# EAGLE board breadboard_shield_v0.95_rev6_161019 (EAGLE 7.7.0)
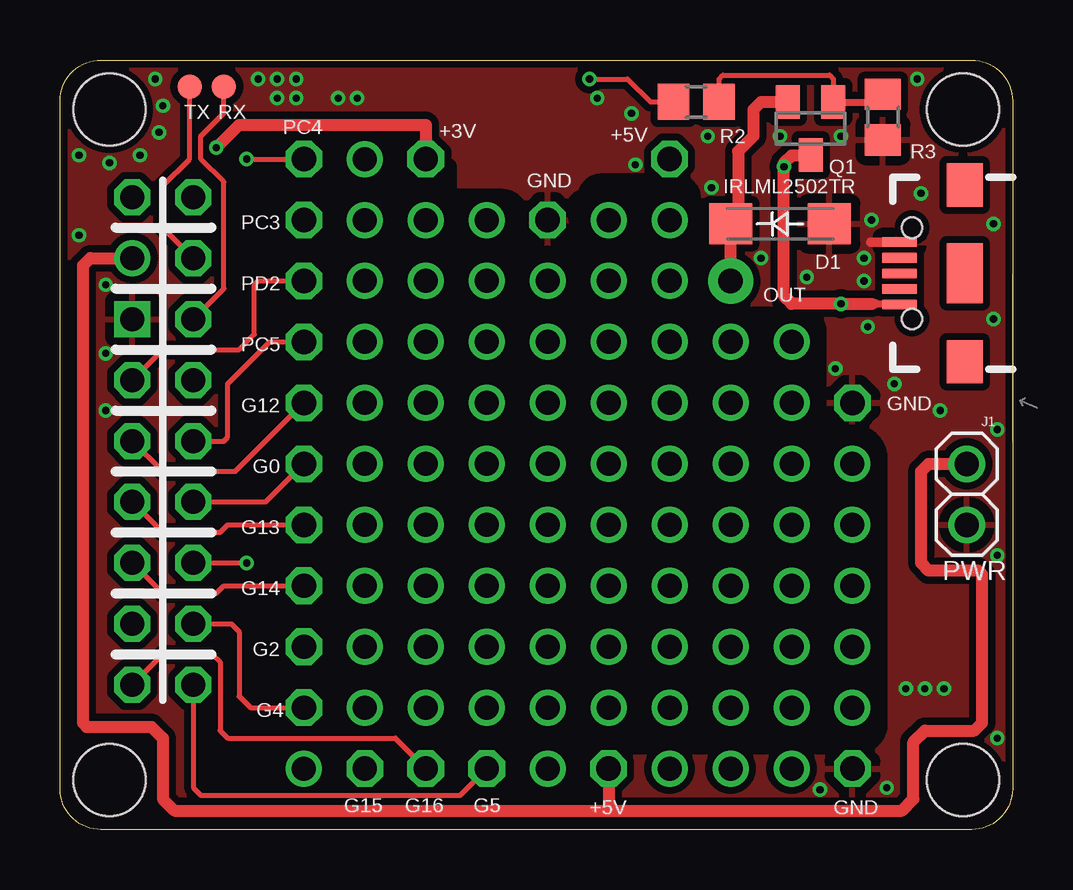
[diagram p0: board, top side]
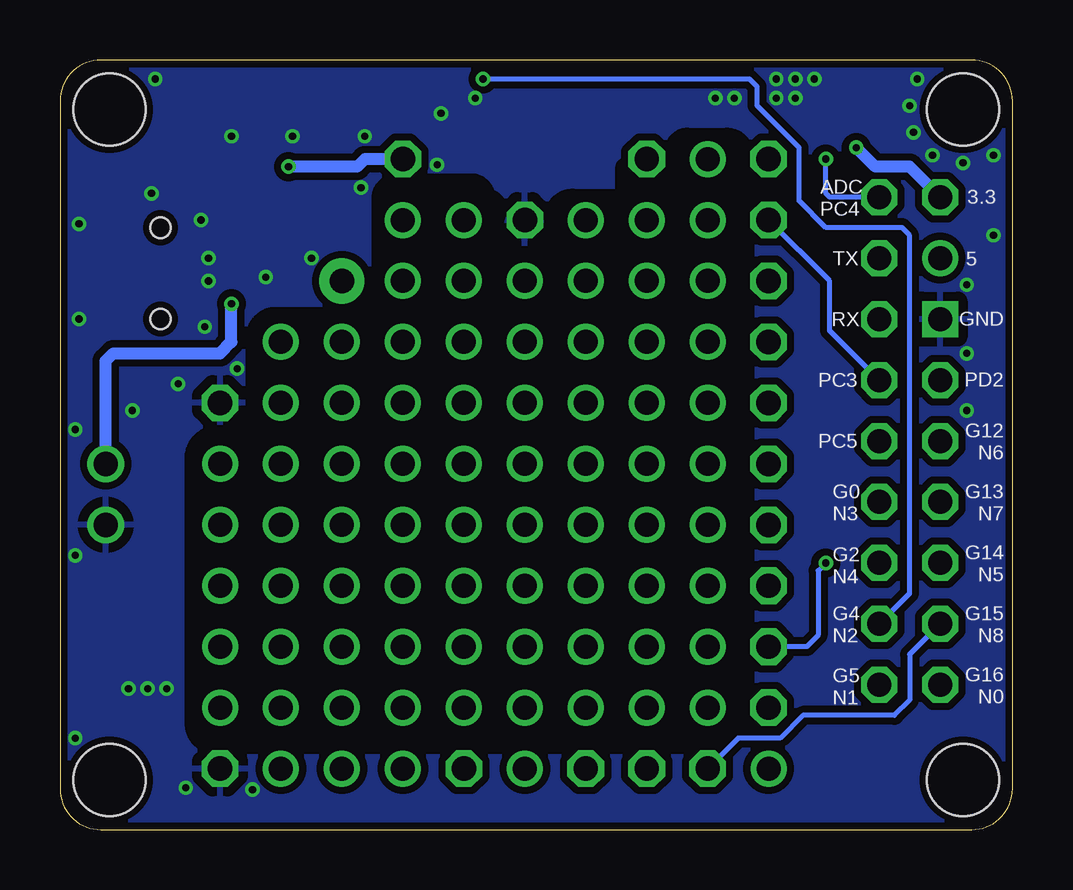
[diagram p1: board, bottom side, seen from below]

Size 39.69 x 32.07 mm. Coordinates in mm from the lower left corner, seen from the top.
Outline: 1.8,32.07 37.55,32.07
Outline: 37.99,0 1.7,0 arc-90 0,1.7 0,30.37 arc-90 1.7,32.07 37.99,32.07 arc-90 39.69,30.37 39.69,1.7 arc-90 37.99,0
Copper layers (1*16): Top 0.035mm / dielectric 1.5mm / Bottom 0.035mm
Design rules "rezonit_35mm": minimum track width 0.2mm, minimum drill 0.3mm, track to track 0.2mm, track to pad 0.2mm, pad to pad 0.2mm, via to via 0.2mm, smd to smd 0.1mm, copper to edge 0.25mm, drill to drill 0.2mm, minimum pad ring 0.2mm, minimum via ring 0.15mm, stop-mask expansion 0.05mm, vias tented up to drill 0.7mm, thermal gap 0.4mm
Holes 3 mm at 2.06,2.06 37.62,2.06 2.06,30 37.62,30
tRestrict: area 11.1,3.5 to 34.1,28.9
bRestrict: area 11.1,3.5 to 34.1,28.9

## Footprints (pad centres in the part's own frame; a part is rotated, then mirrored left to right if it is on the bottom)
1X01 = drill 1.016 octagon: 1 0,0
COMM_V2_L(SHIELD) = drill 1 octagon: 3V3 -1.27,10.16; A/PC4 1.27,10.16; G0N3 1.27,-2.54; G2N4 1.27,-5.08; G4N2 1.27,-7.62; G5N1 1.27,-10.16; G12N6 -1.27,0; G13N7 -1.27,-2.54; G14N5 -1.27,-5.08; G15N8 -1.27,-7.62; G16N0 -1.27,-10.16; PC3 1.27,2.54; PC5 1.27,0; PD2 -1.27,2.54; RX 1.27,5.08; TX 1.27,7.62 | drill 1: 5V -1.27,7.62 | drill 1 square: GND -1.27,5.08
SMA-DO214AC = smd 1.8 x 1.7: A -2.05,0; K 2.05,0
USB-B-MICRO-SMD_V03 = smd 1.45 x 0.4: D+ 2.725,0; D- 2.725,0.65; GND 2.725,-1.3; ID 2.725,-0.65; VBUS 2.725,1.3 | smd 1.5 x 1.8: SHIELD1 0,3.685; SHIELD2 0,-3.685 | smd 1.5 x 2.5: SHIELD3 0,0 | hole 0.85: 2.2,1.9; 2.2,-1.9
1X01' = drill 1.016 pad 1.88: 1 0,0
1X02 = drill 1.016: 1 -1.27,0; 2 1.27,0
SOT23 = smd 1 x 1.4: 1 -0.95,-1.1; 2 0.95,-1.1; 3 0,1.1
R0805 = smd 1.3 x 1.5: 1 -0.95,0; 2 0.95,0
PAD.03X.04 = smd 1.016 x 1.016: P$1 0,0

## Placement (x,y rotation side)
+3V  [1X01]  15.24,27.94 0 top
+5V  [1X01]  25.4,27.94 0 top
+5V1  +5V  [1X01]  22.86,2.54 0 top
COMM  [COMM_V2_L(SHIELD)]  4.29,16.19 0 top
D1  GF1  [SMA-DO214AC]  30,25.24 180 top
G0  [1X01]  10.16,15.24 0 top
G2  [1X01]  10.16,7.62 0 top
G4  [1X01]  10.16,5.08 0 top
G5  [1X01]  17.78,2.54 0 top
G12  [1X01]  10.16,17.78 0 top
G13  [1X01]  10.16,12.7 0 top
G14  [1X01]  10.16,10.16 0 top
G15  [1X01]  12.7,2.54 0 top
G16  [1X01]  15.24,2.54 0 top
GND  [1X01]  20.32,25.4 0 top
GND1  GND  [1X01]  33.02,2.54 0 top
GND2  GND  [1X01]  33.02,17.78 0 top
J1  [USB-B-MICRO-SMD_V03]  37.7,23.18 180 top
OUT  [1X01']  27.94,22.86 0 top
PC3  [1X01]  10.16,25.4 0 top
PC4  [1X01]  10.16,27.94 0 top
PC5  [1X01]  10.16,20.32 0 top
PD2  [1X01]  10.16,22.86 0 top
PWR  [1X02]  37.78,13.97 270 top
Q1  IRLML2502TR  [SOT23]  31.27,29.21 180 top
R2  300R  [R0805]  26.51,30.32 180 top
R3  10k  [R0805]  34.29,29.69 90 top
RX  TEST-POINT3X4  [PAD.03X.04]  6.83,30.96 0 top
TX  TEST-POINT3X4  [PAD.03X.04]  5.4,30.96 0 top

## Library data of the parts
+3V +5V +5V1 G0 G2 G4 G5 G12-G16 GND GND1 GND2 PC3-PC5 PD2 PWR = pinhead
COMM = ESP12
D1 = diode
J1 = SparkFun-Connectors; PROD_ID: CONN-11752
OUT = SparkFun-Connectors
Q1 = transistor-small-signal
R2 R3 = rcl
RX TX = SparkFun-Passives

## Nets
+3V3: +3V.1 COMM.3V3
+5V: +5V1.1 +5V.1 COMM.5V J1.VBUS PWR.1 Q1.3
G0N3: COMM.G0N3 G0.1
G2N4: COMM.G2N4 G2.1
G4N2: COMM.G4N2 G4.1 R2.2
G5N1: COMM.G5N1 G5.1
G12N6: COMM.G12N6 G12.1
G13N7: COMM.G13N7 G13.1
G14N5: COMM.G14N5 G14.1
G15N8: COMM.G15N8 G15.1
G16N0: COMM.G16N0 G16.1
GND: COMM.GND D1.A GND1.1 GND2.1 GND.1 J1.GND PWR.2 R3.1
N$1: Q1.1 R2.1 R3.2
OUT: D1.K OUT.1 Q1.2
PC3: COMM.PC3 PC3.1
PC4: COMM.A/PC4 PC4.1
PC5: COMM.PC5 PC5.1
PD2: COMM.PD2 PD2.1
RX: COMM.RX RX.P$1
TX: COMM.TX TX.P$1

## Tracks (layer width: path | path; a pad name or v marks a point on that pad's centre or on a via)
+3V3  (via drill 0.3 pad 0.6)
  Top 0.5: v6.51,28.42 7.46,29.37 15.24,29.37 +3V.1
  Bottom 0.5: v6.51,28.42 5.71,27.62 4.29,27.62 COMM.3V3
+5V  (via drill 0.3 pad 0.6)
  Top 0.3: 33.97,21.91 34.87,21.91 J1.VBUS | Q1.3
  Top 0.4: 33.81,21.91 33.97,21.91
  Top 0.5: 22.86,0.79 4.76,0.79 4.29,1.27 4.29,3.81 3.81,4.29 1.11,4.29 0.95,4.45 0.95,23.5 1.27,23.81 COMM.5V | 22.86,0.79 35.08,0.79 35.56,1.27 35.56,3.65 36.04,4.13 38.1,4.13 38.42,4.45 38.42,10.64 38.26,10.79 36.2,10.79 35.88,11.11 35.88,14.92 36.2,15.24 PWR.1 | 33.81,21.91 v32.54,21.91 30.48,21.91 30.16,22.23 v30.16,27.62 30.16,27.78 30.48,28.1 Q1.3 | +5V1.1 22.86,0.79
  Bottom 0.5: PWR.1 37.78,19.53 37.47,19.84 33.02,19.84 32.54,20.32 v32.54,21.91 | +5V.1 26.99,27.94 27.3,27.62 v30.16,27.62
G0N3
  Top 0.2: COMM.G0N3 8.57,13.65 G0.1
G2N4  (via drill 0.3 pad 0.6)
  Top 0.2: COMM.G2N4 v7.78,11.11
  Bottom 0.2: v7.78,11.11 8.1,10.79 8.1,8.1 8.57,7.62 G2.1
G4N2  (via drill 0.3 pad 0.6)
  Top 0.2: COMM.G4N2 7.14,8.57 7.46,8.26 7.46,5.56 7.94,5.08 G4.1 | v22.07,31.27 23.65,31.27 24.61,30.32 R2.2
  Top 0.3: 25.24,30.32 R2.2
  Bottom 0.2: COMM.G4N2 4.29,9.84 4.29,24.77 4.6,25.08 7.78,25.08 8.89,26.19 8.89,28.42 10.64,30.16 10.64,30.96 10.95,31.27 v22.07,31.27
G5N1
  Top 0.2: COMM.G5N1 5.56,1.75 5.87,1.43 16.67,1.43 G5.1
G12N6
  Top 0.2: G12.1 7.3,14.92 4.29,14.92 COMM.G12N6
G13N7
  Top 0.2: COMM.G13N7 4.29,12.38 6.67,12.38 6.99,12.7 G13.1
G14N5
  Top 0.2: COMM.G14N5 4.29,9.84 6.51,9.84 6.83,10.16 G14.1
G15N8
  Bottom 0.2: G15.1 11.43,3.81 9.68,3.81 8.73,4.76 4.92,4.76 4.29,5.4 4.29,7.3 COMM.G15N8
G16N0
  Top 0.2: COMM.G16N0 4.29,7.3 6.35,7.3 6.67,6.99 6.67,4.13 6.99,3.81 13.97,3.81 G16.1
GND  (via drill 0.3 pad 0.6)
  Top 0.4: J1.GND 33.78,24.48 | 32.38,25.86 D1.A
  other vias: 0.79,28.1 2.06,27.78 31.67,1.67 35.24,5.87 36.04,5.87 36.83,5.87 35.88,26.51 22.38,30.48 38.89,21.27 36.67,17.46 38.89,25.24 32.54,28.89 3.33,28.1 9.84,31.27 11.59,30.48 0.79,24.77 9.84,30.48 1.91,22.7 1.91,19.84 1.91,17.46 12.38,30.48 3.97,31.27 4.29,30.16 4.13,29.05 9.05,31.27 9.05,30.48 8.26,31.27 33.81,25.4 33.5,22.86 33.5,23.81 29.21,23.81 26.99,28.89 33.66,20.95 34.77,18.57 23.81,29.84 35.72,31.27 34.45,1.75 30,28.89 32.31,19.21 27.15,26.75 23.97,27.7 31.11,23.02 39.05,3.81 39.05,11.43 39.05,16.67
  pour Top (isolate 0.3): 0.32,2.33 0.32,30.53 arc-90 1.86,31.75 37.67,31.75 arc-90 39.37,30.21 39.37,2.02 arc-90 37.67,0.32 1.86,0.32 arc-90
  pour Bottom (isolate 0.3): 0.32,2.33 0.32,30.53 arc-90 1.86,31.75 37.67,31.75 arc-90 39.37,30.21 39.37,2.02 arc-90 37.67,0.32 1.86,0.32 arc-90
N$1
  Top 0.2: R2.1 27.46,31.27 27.62,31.43 32.07,31.43 32.23,31.27 Q1.1
  Top 0.3: Q1.1 33.96,30.31 R3.2
N$3  (via drill 1, 1 pad 1.5)
  other vias: 17.78,25.4 17.78,25.4
N$4  (via drill 1, 1 pad 1.5)
  other vias: 17.78,22.86 17.78,22.86
N$5  (via drill 1, 1 pad 1.5)
  other vias: 17.78,20.32 17.78,20.32
N$6  (via drill 1, 1 pad 1.5)
  other vias: 17.78,17.78 17.78,17.78
N$7  (via drill 1, 1 pad 1.5)
  other vias: 20.32,2.54 20.32,2.54
N$8  (via drill 1, 1 pad 1.5)
  other vias: 20.32,5.08 20.32,5.08
N$10  (via drill 1, 1 pad 1.5)
  other vias: 22.86,5.08 22.86,5.08
N$11  (via drill 1, 1 pad 1.5)
  other vias: 12.7,22.86 12.7,22.86
N$12  (via drill 1, 1 pad 1.5)
  other vias: 12.7,20.32 12.7,20.32
N$13  (via drill 1, 1 pad 1.5)
  other vias: 12.7,17.78 12.7,17.78
N$14  (via drill 1, 1 pad 1.5)
  other vias: 15.24,10.16 15.24,10.16
N$17  (via drill 1, 1 pad 1.5)
  other vias: 15.24,12.7 15.24,12.7
N$18  (via drill 1, 1 pad 1.5)
  other vias: 12.7,25.4 12.7,25.4
N$20  (via drill 1, 1 pad 1.5)
  other vias: 12.7,27.94 12.7,27.94
N$21  (via drill 1, 1 pad 1.5)
  other vias: 25.4,5.08 25.4,5.08
N$23  (via drill 1, 1 pad 1.5)
  other vias: 25.4,2.54 25.4,2.54
N$24  (via drill 1, 1 pad 1.5)
  other vias: 27.94,2.54 27.94,2.54
N$25  (via drill 1, 1 pad 1.5)
  other vias: 27.94,5.08 27.94,5.08
N$26  (via drill 1, 1 pad 1.5)
  other vias: 30.48,5.08 30.48,5.08
N$27  (via drill 1, 1 pad 1.5)
  other vias: 30.48,2.54 30.48,2.54
N$29  (via drill 1, 1 pad 1.5)
  other vias: 15.24,25.4 15.24,25.4
N$30  (via drill 1, 1 pad 1.5)
  other vias: 15.24,22.86 15.24,22.86
N$31  (via drill 1, 1 pad 1.5)
  other vias: 12.7,12.7 12.7,12.7
N$35  (via drill 1, 1 pad 1.5)
  other vias: 12.7,10.16 12.7,10.16
N$36  (via drill 1, 1 pad 1.5)
  other vias: 15.24,7.62 15.24,7.62
N$37  (via drill 1, 1 pad 1.5)
  other vias: 17.78,5.08 17.78,5.08
N$38  (via drill 1, 1 pad 1.5)
  other vias: 12.7,5.08 12.7,5.08
N$43  (via drill 1, 1 pad 1.5)
  other vias: 15.24,5.08 15.24,5.08
N$44  (via drill 1, 1 pad 1.5)
  other vias: 12.7,7.62 12.7,7.62
N$45  (via drill 1, 1 pad 1.5)
  other vias: 33.02,5.08 33.02,5.08
N$49  (via drill 1, 1 pad 1.5)
  other vias: 17.78,7.62 17.78,7.62
N$50  (via drill 1, 1 pad 1.5)
  other vias: 12.7,15.24 12.7,15.24
N$67  (via drill 1, 1 pad 1.5)
  other vias: 33.02,7.62 33.02,7.62
N$68  (via drill 1, 1 pad 1.5)
  other vias: 30.48,7.62 30.48,7.62
N$69  (via drill 1, 1 pad 1.5)
  other vias: 27.94,7.62 27.94,7.62
N$70  (via drill 1, 1 pad 1.5)
  other vias: 25.4,7.62 25.4,7.62
N$76  (via drill 1, 1 pad 1.5)
  other vias: 22.86,7.62 22.86,7.62
N$77  (via drill 1, 1 pad 1.5)
  other vias: 10.16,2.54 10.16,2.54
N$82  (via drill 1, 1 pad 1.5)
  other vias: 15.24,15.24 15.24,15.24
N$86  (via drill 1, 1 pad 1.5)
  other vias: 15.24,17.78 15.24,17.78
N$87  (via drill 1, 1 pad 1.5)
  other vias: 15.24,20.32 15.24,20.32
N$89  (via drill 1, 1 pad 1.5)
  other vias: 20.32,7.62 20.32,7.62
N$90  (via drill 1, 1 pad 1.5)
  other vias: 20.32,10.16 20.32,10.16
N$91  (via drill 1, 1 pad 1.5)
  other vias: 22.86,10.16 22.86,10.16
N$93  (via drill 1, 1 pad 1.5)
  other vias: 25.4,10.16 25.4,10.16
N$96  (via drill 1, 1 pad 1.5)
  other vias: 27.94,10.16 27.94,10.16
N$97  (via drill 1, 1 pad 1.5)
  other vias: 30.48,10.16 30.48,10.16
N$98  (via drill 1, 1 pad 1.5)
  other vias: 33.02,10.16 33.02,10.16
N$108  (via drill 1, 1 pad 1.5)
  other vias: 17.78,15.24 17.78,15.24
N$109  (via drill 1, 1 pad 1.5)
  other vias: 17.78,10.16 17.78,10.16
N$110  (via drill 1, 1 pad 1.5)
  other vias: 17.78,12.7 17.78,12.7
N$111  (via drill 1, 1 pad 1.5)
  other vias: 20.32,12.7 20.32,12.7
N$112  (via drill 1, 1 pad 1.5)
  other vias: 22.86,12.7 22.86,12.7
N$114  (via drill 1, 1 pad 1.5)
  other vias: 25.4,12.7 25.4,12.7
N$115  (via drill 1, 1 pad 1.5)
  other vias: 27.94,12.7 27.94,12.7
N$118  (via drill 1, 1 pad 1.5)
  other vias: 30.48,12.7 30.48,12.7
N$119  (via drill 1, 1 pad 1.5)
  other vias: 33.02,12.7 33.02,12.7
N$120  (via drill 1, 1 pad 1.5)
  other vias: 33.02,15.24 33.02,15.24
N$121  (via drill 1, 1 pad 1.5)
  other vias: 30.48,15.24 30.48,15.24
N$122  (via drill 1, 1 pad 1.5)
  other vias: 27.94,15.24 27.94,15.24
N$123  (via drill 1, 1 pad 1.5)
  other vias: 25.4,15.24 25.4,15.24
N$124  (via drill 1, 1 pad 1.5)
  other vias: 22.86,15.24 22.86,15.24
N$125  (via drill 1, 1 pad 1.5)
  other vias: 20.32,15.24 20.32,15.24
N$126  (via drill 1, 1 pad 1.5)
  other vias: 20.32,22.86 20.32,22.86
N$127  (via drill 1, 1 pad 1.5)
  other vias: 20.32,20.32 20.32,20.32
N$128  (via drill 1, 1 pad 1.5)
  other vias: 20.32,17.78 20.32,17.78
N$129  (via drill 1, 1 pad 1.5)
  other vias: 22.86,17.78 22.86,17.78
N$130  (via drill 1, 1 pad 1.5)
  other vias: 22.86,20.32 22.86,20.32
N$131  (via drill 1, 1 pad 1.5)
  other vias: 25.4,20.32 25.4,20.32
N$132  (via drill 1, 1 pad 1.5)
  other vias: 25.4,17.78 25.4,17.78
N$133  (via drill 1, 1 pad 1.5)
  other vias: 27.94,17.78 27.94,17.78
N$134  (via drill 1, 1 pad 1.5)
  other vias: 30.48,17.78 30.48,17.78
N$135  (via drill 1, 1 pad 1.5)
  other vias: 30.48,20.32 30.48,20.32
N$136  (via drill 1, 1 pad 1.5)
  other vias: 27.94,20.32 27.94,20.32
N$138  (via drill 1, 1 pad 1.5)
  other vias: 25.4,22.86 25.4,22.86
N$139  (via drill 1, 1 pad 1.5)
  other vias: 22.86,22.86 22.86,22.86
N$143  (via drill 1, 1 pad 1.5)
  other vias: 22.86,25.4 22.86,25.4
N$144  (via drill 1, 1 pad 1.5)
  other vias: 25.4,25.4 25.4,25.4
OUT
  Top 0.2: 28.26,25.89 28.26,25.55 D1.K
  Top 0.5: Q1.2 29.2,30.31 28.89,30 28.89,28.89 28.26,28.26 28.26,25.89 | OUT.1 27.94,25.86 D1.K
PC3
  Bottom 0.2: COMM.PC3 7.62,20.8 7.62,22.86 PC3.1
PC4  (via drill 0.3 pad 0.6)
  Top 0.2: v7.78,27.94 PC4.1
  Bottom 0.2: COMM.A/PC4 7.62,26.35 7.78,26.51 v7.78,27.94
PC5
  Top 0.2: COMM.PC5 6.83,16.19 6.99,16.35 6.99,18.57 8.73,20.32 PC5.1
PD2
  Top 0.2: COMM.PD2 4.29,20 7.46,20 8.1,20.64 8.1,22.7 8.26,22.86 PD2.1
RX
  Top 0.2: COMM.RX 6.83,22.54 6.83,26.99 5.87,27.94 5.87,28.89 6.83,29.84 RX.P$1
TX
  Top 0.2: COMM.TX 4.29,25.08 4.29,26.83 5.4,27.94 TX.P$1

## Text on the board
tNames: IRLML2502TR